# Altium PCB SSRoof.PcbDoc
Units mm, origin at the board's own origin, x right, y up, seen from the top; angles counter-clockwise.
Board outline 40.02 x 40.01 mm, 2 copper layers (Top Layer, Bottom Layer); 45 components, 37 nets, 202 pads, 29 vias.
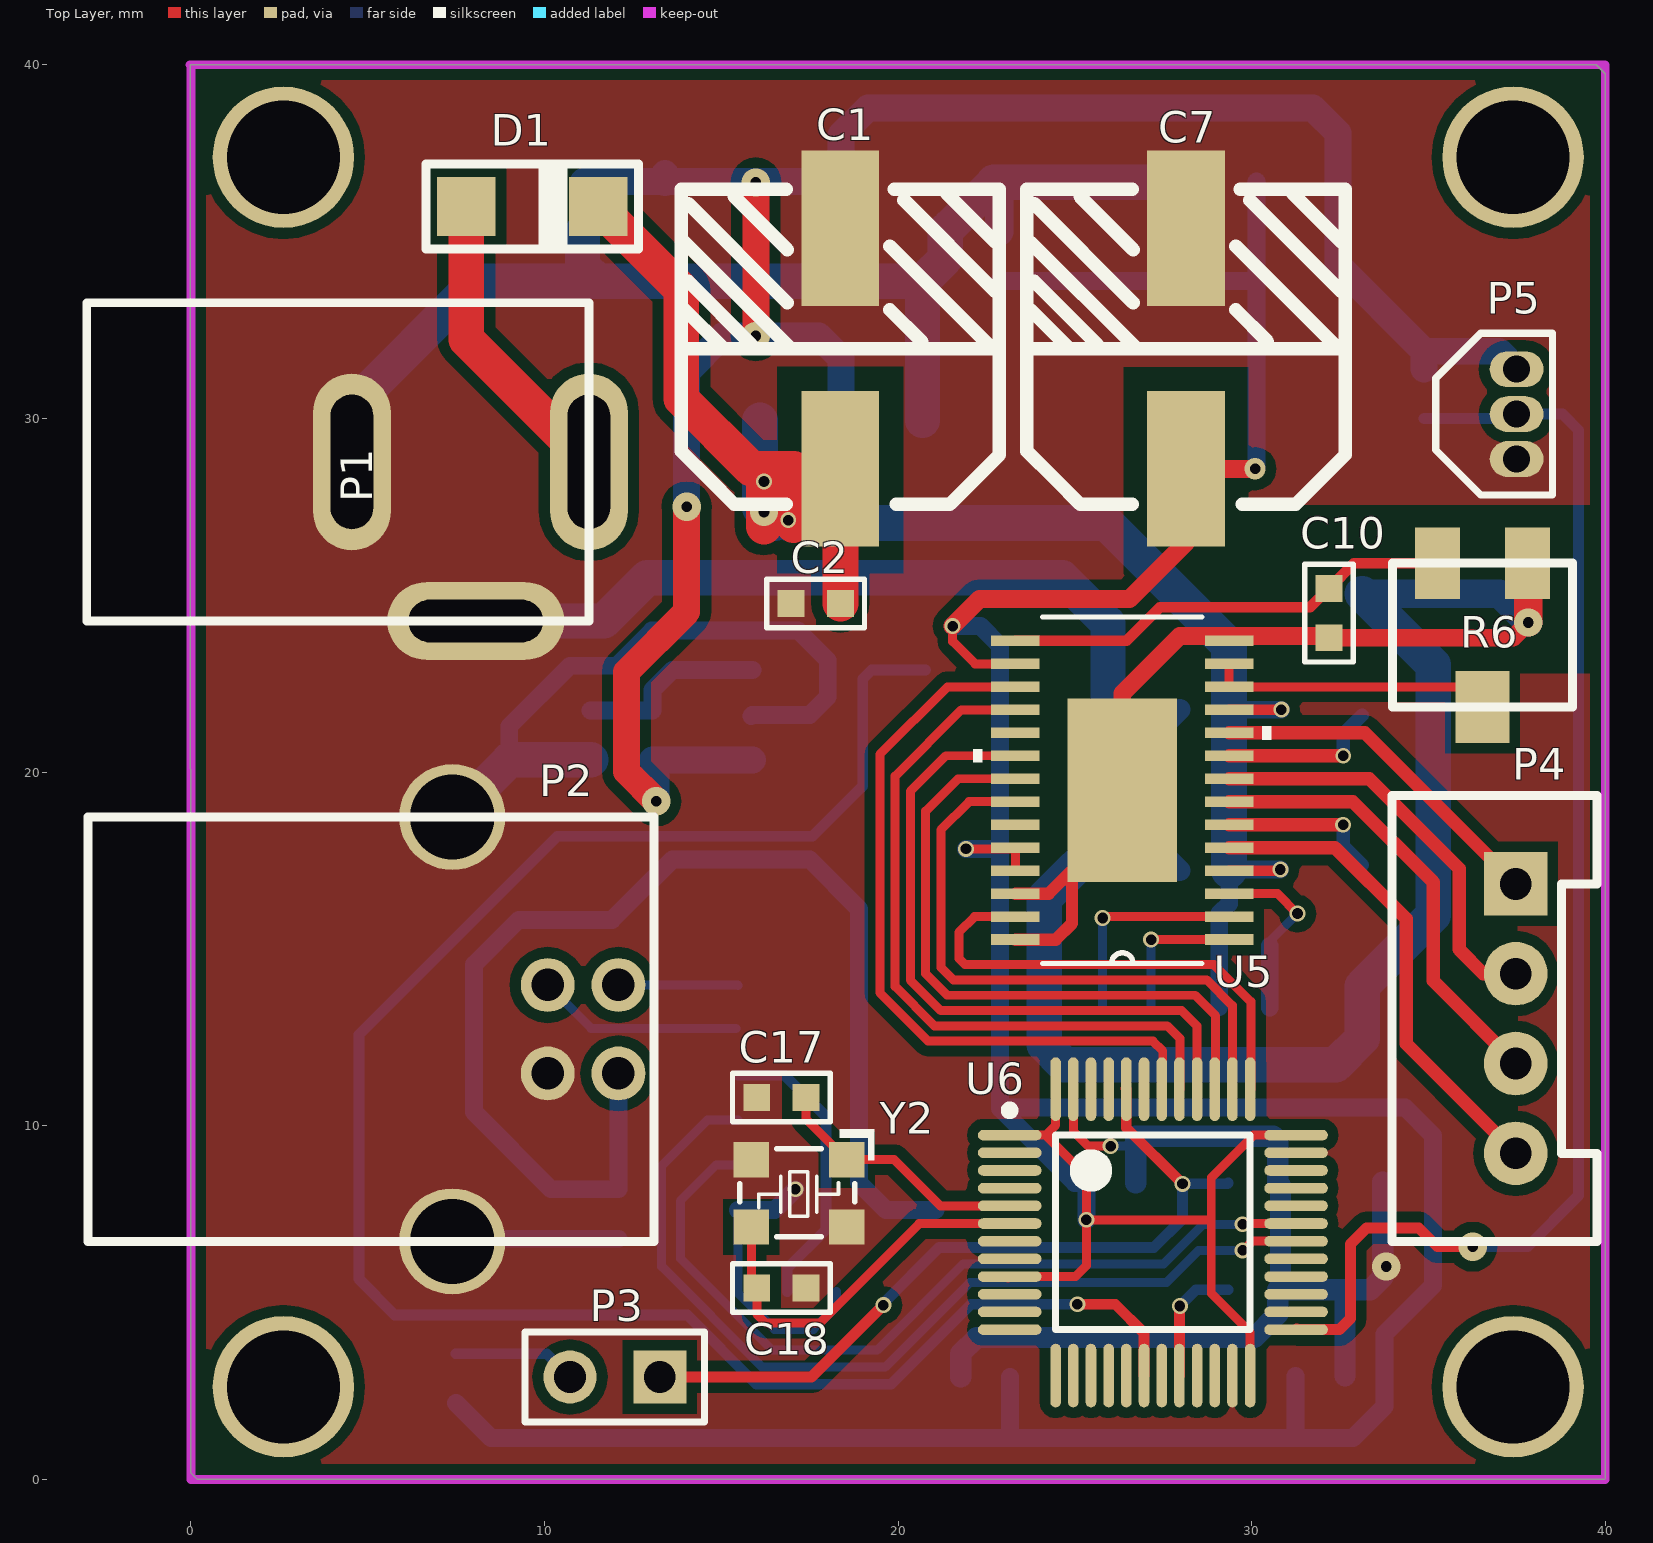
[diagram p0: Top Layer view]
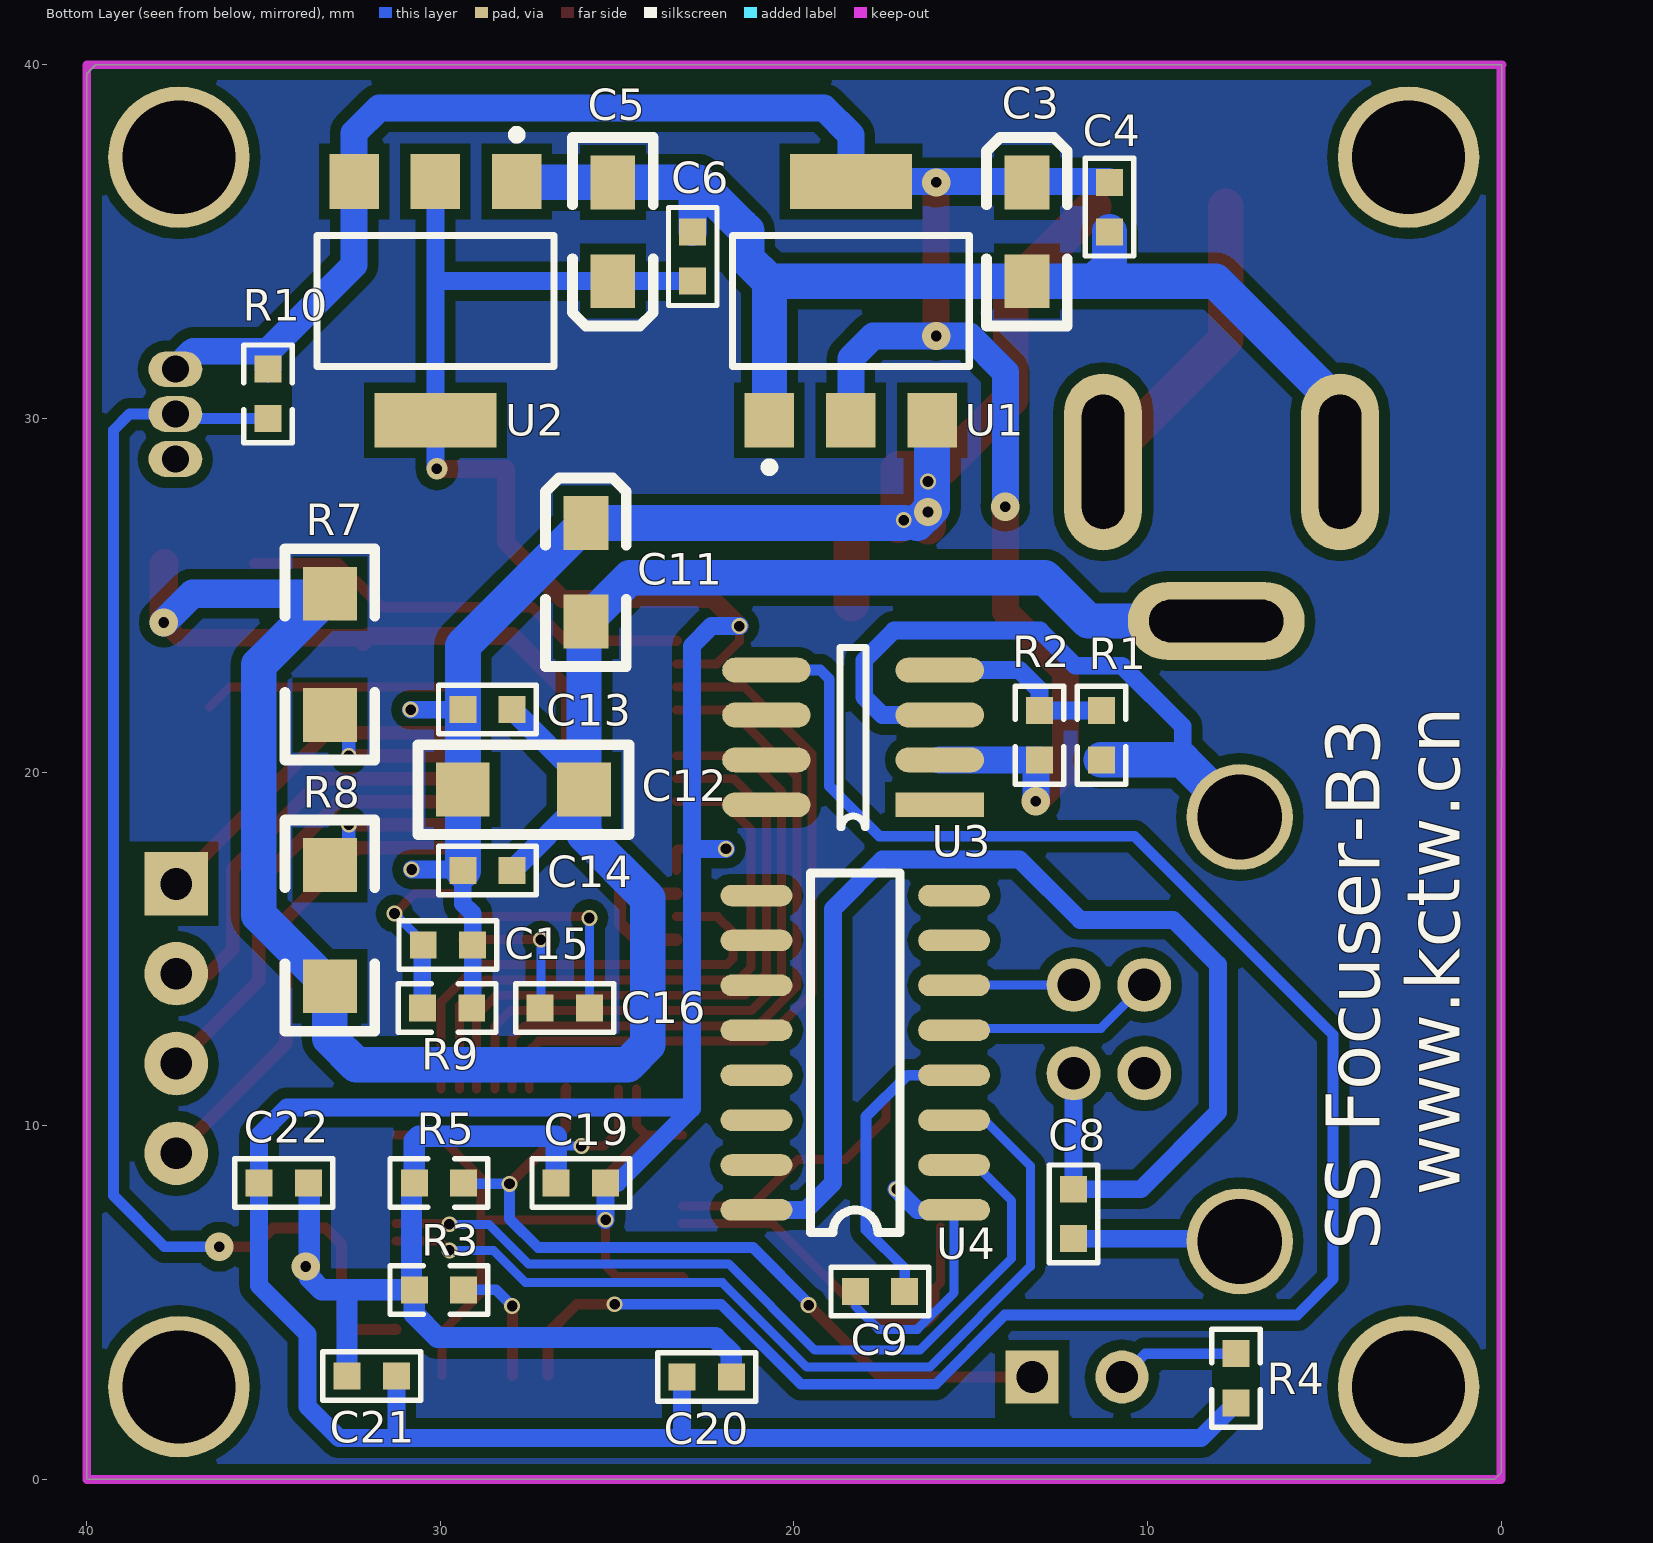
[diagram p1: Bottom Layer view, seen from below]

## Layer stack, top to bottom
Top Solder: solder mask 0.0102, Solder Resist, Dk 3.5
Top Layer: signal copper 0.0356
Dielectric1: dielectric 0.32, FR-4, Dk 4.8
Bottom Layer: signal copper 0.0356
Bottom Solder: solder mask 0.0102, Solder Resist, Dk 3.5

## Board outline
0,0.178 0.178,0 39.997,0 39.997,39.749 39.741,40.005 -0.02,40.005

## Design rules (kind name [scope] priority, off if disabled: settings)
Clearance Clearance_pyog [InPolygon] p1: gap=0.305
Clearance Clearance_mcu [InComponentClass('U7')] p2: gap=0.178
Clearance [All] p3: gap=0.178
HoleSize [All] p1: absolutevalues=TRUE maxlimit=25.4 minlimit=0.025 maxpercent=80.000 minpercent=20.000
MinimumSolderMaskSliver [All] p1: minsoldermaskwidth=0
PolygonConnect GNDVIA [IsVia] p1: connectstyle=Direct reliefconductorwidth=0.254 reliefentries=4 polygonreliefangle="90 Angle" airgapwidth=0.254
PolygonConnect [All] p2: connectstyle=Direct reliefconductorwidth=0.254 reliefentries=4 polygonreliefangle="90 Angle" airgapwidth=0.254
RoutingVias [All] p1: holewidth=0.711 width=1.27 viastyle="Through Hole" minholewidth=0.3 minwidth=0.45 maxholewidth=0.711 maxwidth=1.27
SilkToSilkClearance [All] p1: silktosilkclearance=0
SilkToSolderMaskClearance [IsPad] p1: minsilkscreentomaskgap=0 clearancetoexposedcopper=TRUE
SolderMaskExpansion [All] p1: expansion=0.102
Width [All] p1: maxlimit=1.27 minlimit=0.254 preferedwidth=0.254
25 further rules are at their usual default settings.

## Components (designator, comment, footprint, x,y, rotation, side; value= is the part's Value field where it differs from the comment)
C1 "470uF" 16V/470U(CD10X10D5) 18.364,31.979 r90 top
C2 "100nF" 0603C 16.967,24.765 r0 top
C3 "10uF" 3216 13.411,36.678 r90 bottom
C4 "100nF" 0603C 11.074,35.281 r90 bottom
C5 "10uF" 3216 25.121,33.884 r270 bottom
C6 "100nF" 0603C 22.86,35.281 r270 bottom
C7 "1000uF" 16V/470U(CD10X10D5) 28.143,31.979 r90 top
C8 "100nF" 0603C 12.09,6.807 r90 bottom
C9 "100nF" 0603C 18.263,5.309 r180 bottom
C10 "0.47uF" 0603C 32.182,23.8 r90 top
C11 "10uF" 3216 25.883,27.051 r90 bottom
C12 "4.7uF" 1206C 29.362,19.507 r180 bottom
C13 "100nF" 0603C 27.965,21.768 r0 bottom
C14 "100nF" 0603C 27.965,17.221 r0 bottom
C15 "100nF" 0603C 29.083,15.113 r0 bottom
C16 "10nF" 0603C 25.781,13.335 r0 bottom
C17 "20pF" 0603C 17.399,10.795 r180 top
C18 "20pF" 0603C 16.002,5.41 r0 top
C19 "100nF" 0603C 26.721,8.382 r180 bottom
C20 "100nF" 0603C 21.768,2.896 r0 bottom
C21 "100nF" 0603C 32.639,2.921 r180 bottom
C22 "100nF" 0603C 33.731,8.382 r0 bottom
D1 "M7" DO-214AC 9.652,35.992 r0 top
P1 "SOURCE" DC_5.5MM -2.946,33.274 r0 top locked
P2 "USB-B" USB-B 12.09,11.481 r0 top locked
P3 "BOOT0" HDR1X2 13.259,2.896 r180 top
P4 "Header 4" XH_4_V 37.465,16.84 r270 top
P5 "DS18B20" TO-92B 37.49,31.394 r270 top
R1 "2K" 0603R 11.303,21.742 r270 bottom
R2 "4.7K" 0603R 13.056,21.742 r270 bottom
R3 "10K" 0603R 30.734,5.359 r180 bottom
R4 "4.7K" 0603R 7.493,3.556 r270 bottom
R5 "10K" 0603R 29.337,8.382 r0 bottom
R6 "RPot" VR_SMD 36.525,23.876 r180 top
R7 "0.1Ω" 1206R 33.122,25.044 r270 bottom
R8 "0.1Ω" 1206R 33.122,13.945 r90 bottom
R9 "1M" 0603R 30.505,13.335 r180 bottom
R10 "4.7K" 0603R 34.874,29.997 r90 bottom
U1 "AMS1117-5.0" SOT223 18.39,33.325 r180 bottom
U2 "AMS1117-3.3" SOT223 30.136,33.325 r0 bottom
U3 "MAX813LCSA" SOP-8 15.875,19.075 r0 bottom
U4 "CH340C" SO-16 15.469,7.62 r0 bottom
U5 "DRV8825" HTSSOP 26.34,19.488 r180 top
U6 "STM32F103C8T6" LQFP48_N 27.203,6.985 r270 top
Y2 "8MHz  无源" X3225 18.517,9.068 r180 top

## Footprints (in the part's own frame and the unit in brackets; to place one, negate y for a bottom-side part, rotate by r counter-clockwise, add the part's x,y. Pads: shape width x height; smd on the part's side, far side on the other; paste and mask are expansions set on the pad)
16V/470U(CD10X10D5) [mm] "取自《FE-3AD》"
  rect 4.4x2.2 smd: 1(-3.4,0) 2(3.4,0)
  Top Layer pour cut-out: -6.35,1.778 -0.508,1.778 -0.508,-1.778 -6.35,-1.778
  silkscreen extent -4.4,-4.5 4.5,4.5
0603C [mil]
  rect 30x30 smd: 1(0,0) 2(55,0)
  silkscreen extent -27,-27 82,27, body extent -4,-16 58,16, height 12
0603R [mil]
  rect 30x30 smd: 1(0,0) 2(55,0)
  silkscreen extent -27,-27 82,27, body extent -4,-18 58,16, height 18
1206C [mil]
  rect 60x60 smd: 1(0,0) 2(135,0)
  silkscreen extent -50,-50 185,50, body extent 6,-33 132,29, height 40
1206R [mil]
  rect 60x60 smd: 1(0,0) 2(135,0)
  silkscreen extent -50,-50 185,50, body extent 5,-32 131,30, height 22
3216 [mil]
  rect 60x50 smd: 1(0,0) 2(-110,0)
  silkscreen extent -160,-45 50,45, body extent -151,-35 38,36, height 73
DC_5.5MM [mm]
  oval 2.2x5 hole 1.2 slot 3.8 at 90 deg: 1(14.2,-4.5) 2(7.5,-4.5)
  oval 5x2.2 hole 1.2 slot 3.8 at 0 deg: 3(11,-9)
  silkscreen extent 0,-9 14.2,0, body extent -0.1,-8.88 14.1,-0.12, height 10.82
DO-214AC [mm]
  rect 1.655x1.67 smd: 1(1.865,0) 2(-1.865,0)
  silkscreen extent -3,-1.2 3,1.2, body extent -2.74,-1.4 2.74,1.4, height 2.3
HDR1X2 [mm] "Connector; Header; 2 Position"
  rect 1.5x1.5 hole 0.9: 1(0,0)
  round 1.5 hole 0.9: 2(2.54,0)
  silkscreen extent -1.27,-1.27 3.81,1.27, body extent -1.27,-1.27 3.81,1.27, height 7.58
HTSSOP [mil]
  rect 54x12 smd: 1(-119,166.34) 2(-119,140.75) 3(-119,115.16) 4(-119,89.57) 5(-119,63.98) 6(-119,38.39) 7(-119,12.8) 8(-119,-12.8) 9(-119,-38.39) 10(-119,-63.98) 11(-119,-89.57) 12(-119,-115.16) 13(-119,-140.75) 14(-119,-166.34) 15(119,-166.34) 16(119,-140.75) 17(119,-115.16) 18(119,-89.57) 19(119,-63.98) 20(119,-38.39) 21(119,-12.8) 22(119,12.8) 23(119,38.39) 24(119,63.98) 25(119,89.57) 26(119,115.16) 27(119,140.75) 28(119,166.34)
  rect 122.05x203.94 smd: 29(0,0)
  silkscreen extent -166,-193 166,193, body extent -133,-191 120,191, height 40
LQFP48_N [mm]
  oval 0.3x1.8 smd: 1(-2.75,-4.05) 2(-2.25,-4.05) 3(-1.75,-4.05) 4(-1.25,-4.05) 5(-0.75,-4.05) 6(-0.25,-4.05) 7(0.25,-4.05) 8(0.75,-4.05) 9(1.25,-4.05) 10(1.75,-4.05) 11(2.25,-4.05) 12(2.75,-4.05) 25(2.75,4.05) 26(2.25,4.05) 27(1.75,4.05) 28(1.25,4.05) 29(0.75,4.05) 30(0.25,4.05) 31(-0.25,4.05) 32(-0.75,4.05) 33(-1.25,4.05) 34(-1.75,4.05) 35(-2.25,4.05) 36(-2.75,4.05)
  oval 1.8x0.3 smd: 13(4.05,-2.75) 14(4.05,-2.25) 15(4.05,-1.75) 16(4.05,-1.25) 17(4.05,-0.75) 18(4.05,-0.25) 19(4.05,0.25) 20(4.05,0.75) 21(4.05,1.25) 22(4.05,1.75) 23(4.05,2.25) 24(4.05,2.75) 37(-4.05,2.75) 38(-4.05,2.25) 39(-4.05,1.75) 40(-4.05,1.25) 41(-4.05,0.75) 42(-4.05,0.25) 43(-4.05,-0.25) 44(-4.05,-0.75) 45(-4.05,-1.25) 46(-4.05,-1.75) 47(-4.05,-2.25) 48(-4.05,-2.75)
  silkscreen extent -3.57,-4.17 2.75,2.75, body extent -4.5,-4.5 4.5,4.5, height 1.5
SO-16 [mil]
  oval 80x24 smd: 1(0,0) 2(0,-50) 3(0,-100) 4(0,-150) 5(0,-200) 6(0,-250) 7(0,-300) 8(0,-350) 9(220,-350) 10(220,-300) 11(220,-250) 12(220,-200) 13(220,-150) 14(220,-100) 15(220,-50) 16(220,0)
  silkscreen extent 60,-375 160,25, body extent -12,-377 226,29, height 77
SOP-8 [mm]
  rect 2.5x0.7 smd: 1(0,0)
  oval 2.5x0.7 smd: 2(0,-1.27) 3(0,-2.54) 4(0,-3.81) 5(4.9,-3.81) 6(4.9,-2.54) 7(4.9,-1.27) 8(4.9,0)
  silkscreen extent 2.08,-4.44 2.82,0.64, body extent -0.56,-4.44 5.48,0.58, height 1.6
SOT223 [mm] "SOT-223/SC-73; 4 Leads; Body 6.7 x 7.3 mm, inc. leads (LxW max)"
  rect 1.4x1.55 smd: 1(-2.3,-3.375) 2(0,-3.375) 3(2.3,-3.375)
  rect 3.45x1.55 smd: 4(0,3.375)
  silkscreen extent -3.35,-4.82 3.35,1.85, body extent -3.25,-3.53 3.25,3.43, height 1.7
TO-92B [mil]
  oval 40x60 hole 30: 1(0,0) 2(50,0) 3(100,0)
  silkscreen extent -40,-90 140,40
USB-B [mm]
  round 1.524 hole 0.92: 1(0,0) 2(0,2.5) 3(-2,2.5) 4(-2,0)
  round 3 hole 2.4: 5(-4.7,7.25) 6(-4.7,-4.75)
  silkscreen extent -15,-4.75 1,7.25
VR_SMD [mil]
  rect 50x80 smd: 1(-50,-80) 2(50,-80)
  rect 60x80 smd: 3(0,80)
  silkscreen extent -100,-80 100,80
X3225 [mm]
  rect 1x1 smd: 1(-0.025,0.025) 2(2.667,0.025) 3(2.667,1.93) 4(-0.025,1.93)
  silkscreen extent -0.81,-0.84 3,2.21, body extent -0.23,-0.29 2.97,2.21, height 0.72
XH_4_V [mm]
  rect 1.8x1.8 hole 0.9: 1(0,0)
  round 1.8 hole 0.9: 2(2.54,0) 3(5.08,0) 4(7.62,0)
  silkscreen extent -2.5,-3.5 10.12,2.3, body extent -2.39,-3.35 10.01,2.75, height 7

## Part data
C1: library part C470UF016S, "470UF      16V      CD10X10D5"
C2 C4 C6 C8 C10 C12 C13 C14 C15 C16 C17 C18 C19 C20 C21 C22: library part Cap, "Capacitor"
C3 C5 C7 C11: library part CAP2
C9: library part C
D1: library part Diode, "High Conductance Fast Diode"
P3: library part MHDR1X2, "Header, 2-Pin"
P4: "Header, 4-Pin"
P5: library part "Header 3", "Header, 3-Pin"
R1 R2 R5 R7 R8 R10: library part RES, "Resistor"
R3 R4 R9: library part R
R6: "Potentiometer"
U1 U2: library part AMS1117
U3: library part MAX813L
U4: library part CH340G, "USB2UART"
U6: "STM32 ARM-based 32-bit MCU Performance Line with 64 kB Flash, 20 kB Internal RAM, -40 to +85癈 Temperature, 48-Pin LQFP, Tray"
Y2: library part XTAL_1, "Crystal Oscillator"

## Free pads (board coordinates)
  round 4 hole 3.2: 0(2.616,2.616) 1(37.389,2.616) 2(37.389,37.389) 3(2.616,37.389)

## Via types
v1: diameter 0.45, hole 0.3, Top Layer to Bottom Layer, 20 vias
v2: diameter 0.8, hole 0.3, Top Layer to Bottom Layer, 8 vias
v3: diameter 0.6, hole 0.3, Top Layer to Bottom Layer, 1 vias

## Nets (pads, with @x,y where several pads share a name; then routed paths per layer and width w, separated by ;. In a path a pad name is that pad's centre, name@x,y a point inside that pad or via, vN(x,y) a via of type N, cw(c..) or ccw(c..) an arc to the next point about the centre after c; other vN are vias at no path point)
A1: P4.4 U5.5 | length 13.8
  Top Layer w0.381: U5.5 32.353,17.863 34.366,15.85 34.366,12.319 P4.4
A2: P4.3 U5.7 | length 12.8
  Top Layer w0.381: U5.7 32.856,19.163 35.128,16.891 35.128,14.097 P4.3
B1: P4.1 U5.10 | length 9.9
  Top Layer w0.381: U5.10 33.192,21.113 P4.1
B2: P4.2 U5.8 | length 11.7
  Top Layer w0.381: U5.8 33.324,19.813 35.865,17.272 35.865,14.986 36.551,14.3 P4.2
BOOT0: P3.1 R5.1 U6.44 | length 22.3
  Top Layer w0.305: P3.1 17.551,2.896 v1(19.583,4.928) ; U6.44@26.434,11.055 U6.44 26.453,9.945 v1(28.042,8.357)
  Bottom Layer w0.305: v1@19.558,4.953 21.158,6.553 27.229,6.553 28.042,7.366 v1(28.042,8.357) 29.312,8.357 R5.1
BOOT1: R3.2 U6.20 | length 3.5
  Top Layer w0.305: U6.20 v1@27.953,4.89
  Bottom Layer w0.305: v1(27.965,4.902) 28.423,5.359 R3.2
D3V3: C5.1 C6.2 C7.1 C19.2 C20.2 C21.2 C22.2 R4.2 U2.2 U2.4 U5.16 U5.24 U5.25 U6.1 U6.9 U6.24 U6.36 U6.48 | length 124.1
  Top Layer w0.254: v1(21.539,24.13) 21.539,23.698 22.174,23.063 U5.16 ; v1(21.92,17.831) 23.285,17.831 23.317,17.798 U5.25 ; U6.9@23.108,5.69 U6.9 25.014,5.735 25.324,6.045 v1(25.324,7.341) ; U6.1 24.174,9.735 ; U6.48 24.453,10.014 24.174,9.735 ; 28.854,7.341 v1(25.324,7.341) ; U6.24 29.953,4.159 28.854,5.258 28.854,8.534 30.055,9.735 U6.36 ; 24.174,9.735 25.324,8.585 v1(25.324,7.341)
  Top Layer w0.508: v1(21.539,24.13) 22.301,24.892 26.543,24.892 28.143,26.492 C7.1 v3(30.095,28.579)
  Bottom Layer w0.508: R4.2 8.484,1.168 23.165,1.168 ; v1(21.539,24.13) 22.327,24.13 22.885,23.571 22.885,17.831 ; v1(21.92,17.831) 22.885,17.831 ; C6.2 C5.1 30.11,33.884 30.136,33.909 ; C20.2 23.165,1.168 ; v1(25.324,7.341) C19.2 24.994,8.382 22.885,10.49 22.885,10.516 ; v3@30.124,28.575 30.136,28.586 U2.4 30.136,33.909 ; U2.2 30.136,33.909 ; 31.242,1.245 C21.2 ; 35.128,7.163 35.128,5.486 33.757,4.115 33.757,2.057 32.868,1.168 23.165,1.168 ; 35.128,7.214 C22.2 35.128,9.728 34.341,10.516 22.885,10.516 ; 22.885,10.516 22.885,17.831
D5V0: C3.1 C4.2 P5.1 R2.2 R10.2 U1.2 U1.4 U2.3 U3.2 | length 62.4
  Top Layer w0.762: v2(13.157,19.177) 12.319,20.015 12.319,22.835 14.021,24.536 v2(14.021,27.508) ; v2(15.977,32.334) v2(15.977,36.678)
  Bottom Layer w0.762: C4.2@11.097,36.7 C3.1@13.411,36.7 ; v2(13.157,19.177) 13.157,20.244 R2.2 U3.2 ; C3.1 C3.1@13.411,36.7 ; C3.1@13.411,36.932 C3.1@13.411,36.7 ; v2(14.021,27.508) 14.021,31.318 15.037,32.334 v2(15.977,32.334) 17.755,32.334 18.39,31.699 U1.2 ; R10.2 34.874,31.902 ; P5.1 36.982,31.902 34.874,31.902 ; C3.1@13.411,36.7 U1.4 18.39,38.024 19.152,38.786 31.725,38.786 32.436,38.075 U2.3 32.436,34.341 34.874,31.902
D12V0: C1.1 C2.2 C11.1 C12.1 C13.2 C14.2 C15.1 D1.1 R9.2 U1.3 U5.4 U5.11 | length 48.7
  Top Layer w0.3: U5.4 v1@30.81,17.213 ; U5.11 v1@30.836,21.763
  Top Layer w1: D1.1 13.868,33.64 13.868,30.556 15.846,28.579 17.043,28.579 v1@17.043,26.975
  Top Layer w1.016: 16.205,26.949 v1(16.205,28.219) ; C2.2 C1.1@18.364,27.026
  Bottom Layer w0.5: R9.2@29.083,13.36 C15.1 29.083,16.002 29.362,16.281 C14.2 ; C13.2 v1(30.836,21.768) ; C14.2@29.388,17.247 v1(30.81,17.247)
  Bottom Layer w1.016: U1.3 16.09,27.471 v2(16.205,27.356) 16.51,27.051 ; v1@16.891,27.051 C11.1 29.362,23.571 C13.2 C12.1 C14.2
  other v1: 16.891,27.127
DIR: U5.20 U6.40 | length 19.2
  Top Layer w0.254: U5.20 21.352,20.463 20.345,19.456 20.345,14.12 21.207,13.259 28.016,13.259 28.448,12.827 U6.40@28.448,11.035
EN: U5.21 U6.39 | length 18.3
  Top Layer w0.254: U5.21 21.693,19.813 20.777,18.898 20.777,14.299 21.386,13.691 28.397,13.691 28.981,13.106 U6.39@28.981,11.035
FLT: U5.18 U6.41 | length 20.2
  Top Layer w0.254: U5.18 21.789,21.763 19.914,19.888 19.914,13.941 21.028,12.827 27.61,12.827 27.965,12.471 U6.41@27.965,11.035
GND: C1.2 C2.1 C3.2 C4.1 C5.2 C6.1 C7.2 C8.1 C9.1 C10.1 C11.2 C12.2 C13.1 C14.1 C17.2 C18.2 C19.1 C20.1 C21.1 C22.1 P1.2 P1.3 P2.4 P2.5 P2.6 P5.3 R1.2 R3.1 R5.2 R6.1 R7.1 R8.1 U1.1 U2.1 U3.3 U4.1 U5.14 U5.26 U5.28 U5.29 U6.8 U6.23 U6.35 U6.47 Y2.2 Y2.4 | length 189.8
  Top Layer w0.254: U6.47 24.953,9.845 25.375,9.423 v1(26.01,9.423)
  Top Layer w0.35: U5.28 24.458,15.263 24.917,15.723 U5.29@24.917,17.221 ; U5.26 24.259,16.563 U5.29@24.917,17.221 ; U5.29 26.34,18.644 U5.29@24.917,17.221
  Top Layer w0.5: U5.29 26.34,22.225 27.965,23.851 32.004,23.851 C10.1@32.182,23.673 ; C10.1 37.389,23.8 v2(37.821,24.232)
  Top Layer w0.8: R6.1 37.821,25.883 v2(37.821,24.232)
  Top Layer w1: P1.2@4.554,27.774 P1.2 ; P2.5@6.745,18.731 P2.5
  Bottom Layer w0.254: U4.1@15.469,7.442 15.469,5.283 16.51,4.242 17.602,4.242 18.263,4.902 C9.1 ; v1(26.01,9.423) 26.441,9.423 26.721,9.703 ; C22.1@33.63,8.484 C22.1
  Bottom Layer w0.5: P2.6 7.467,6.807 C8.1 ; 9.005,20.345 9.005,21.299 10.719,23.012 12.04,23.012 13.03,24.003 17.17,24.003 18.009,23.165 18.009,22.123 17.501,21.615 U3.3 U3.3@15.85,21.59
  Bottom Layer w0.508: U4.1 16.51,7.62 v1(17.094,8.204)
  Bottom Layer w0.6: C20.1 21.768,3.556 22.225,4.013 30.074,4.013 30.734,4.674 R3.1 32.639,5.359 ; C12.2@25.933,19.253 C14.1 ; C12.2@25.933,19.736 C13.1 ; C19.1 26.721,9.703 30.607,9.703 30.734,9.576 R5.2 ; R3.1@30.81,5.436 R5.2@30.81,8.306 ; C21.1 32.639,5.359 ; C22.1@33.706,8.407 33.706,5.715 33.35,5.359 32.639,5.359
  Bottom Layer w0.8: 22.708,36.678 22.86,36.525 C6.1 ; R7.1 37.008,25.044 v2(37.821,24.232)
  Bottom Layer w1: P1.2@4.496,30.302 8.077,33.884 11.506,33.884 ; P2.5 9.005,20.345 R1.2 ; P1.3 11.676,24.274 12.903,25.502 24.638,25.502 C11.2 25.933,24.206 25.933,19.736 C12.2 25.933,19.253 25.933,18.237 24.13,16.434 24.13,12.294 24.697,11.727 32.377,11.727 33.122,12.471 R8.1 35.128,15.951 35.128,23.038 R7.1 ; C4.1 11.074,34.315 11.506,33.884 ; U1.1 20.69,33.884 ; 21.336,35.306 21.336,34.53 20.69,33.884 ; 21.476,35.446 22.708,36.678 C5.2 27.813,36.678 U2.1 ; 11.506,33.884 C3.2 20.69,33.884
  other v2: 33.807,6.02
HOME: U5.27 U6.37 | length 13.8
  Top Layer w0.254: U5.27 22.161,15.913 21.717,15.469 21.717,14.732 21.895,14.554 28.931,14.554 29.972,13.513 U6.37@29.972,11.035
NetC9_2: C9.2 U4.4 | length 8.4
  Bottom Layer w0.305: U4.4 16.789,11.43 17.958,10.262 17.958,7.061 16.866,5.969 C9.2
NetC15_2: C15.2 R9.1 U5.3 | length 5.1
  Top Layer w0.254: U5.3 30.732,16.563 v1(31.293,16.002)
  Bottom Layer w0.254: C15.2 30.48,15.189 v1(31.293,16.002)
  Bottom Layer w0.5: R9.1 C15.2@30.505,15.088
NetC16_1: C16.1 U5.2 | length 6.1
  Top Layer w0.254: v1@25.781,15.913 U5.2
  Bottom Layer w0.254: C16.1 v1(25.781,15.875)
NetC16_2: C16.2 U5.1 | length 4.1
  Top Layer w0.254: v1(27.153,15.265) 27.155,15.263 U5.1
  Bottom Layer w0.254: C16.2@27.153,13.36 v1(27.153,15.265)
NetD1_1: D1.2 P1.1 | length 8.7
  Top Layer w1.016: D1.2 7.787,32.241 P1.1
NetP2_2: P2.2 U4.6 | length 3.4
  Bottom Layer w0.254: P2.2 15.458,13.981 U4.6
NetP2_3: P2.3 U4.5 | length 5.8
  Bottom Layer w0.254: P2.3 11.32,12.751 U4.5@15.418,12.751
NetP3_2: P3.2 R4.1 | length 3.5
  Bottom Layer w0.3: R4.1 10.058,3.556 P3.2
NetR1_1: R1.1 R2.1 U3.4 | length 5.4
  Bottom Layer w0.508: R1.1 R2.1 13.056,22.327 13.614,22.885 U3.4
NetR6_3: R6.3 U5.12 U5.13 | length 8
  Top Layer w0.254: U5.13 U5.12 35.956,22.413 R6.3
NetR7_2: R7.2 U5.9 | length 4.6
  Top Layer w0.381: U5.9 v1(32.588,20.463)
  Bottom Layer w0.381: v1(32.588,20.463) 32.588,21.082 R7.2
NetR8_2: R8.2 U5.6 | length 4.6
  Top Layer w0.381: U5.6 v1(32.585,18.513)
  Bottom Layer w0.381: v1(32.585,18.513) 32.585,17.91 R8.2
OSC_IN: C17.1 U6.5 Y2.1 | length 7.4
  Top Layer w0.254: C17.1 17.399,10.185 Y2.1 19.888,9.042 21.196,7.735 U6.5
OSC_OUT: C18.1 U6.6 Y2.3 | length 10.9
  Top Layer w0.254: Y2.3 15.85,5.563 C18.1 16.002,4.674 16.256,4.42 17.78,4.42 20.595,7.235 U6.6
PFO: U3.5 U6.18 | length 54.9
  Top Layer w0.305: v1(25.07,4.953) 26.137,4.953 26.953,4.136 U6.18
  Bottom Layer w0.305: U3.5 19.253,22.885 18.999,22.631 18.999,19.609 17.577,18.186 10.363,18.186 4.75,12.573 4.75,5.664 5.766,4.648 14.035,4.648 15.99,2.692 19.798,2.692 22.059,4.953 v1(25.07,4.953)
RESET: U6.7
RXD: U4.3 U6.30 | length 26.1
  Top Layer w0.254: v1(29.743,6.477) 29.756,6.477 30.014,6.735 U6.30
  Bottom Layer w0.254: U4.3 14.605,10.16 13.31,8.865 13.31,6.02 16.154,3.175 19.634,3.175 22.022,5.563 27.584,5.563 28.499,6.477 v1(29.743,6.477)
SLP: U5.17 U6.42 | length 21.1
  Top Layer w0.254: U5.17 21.396,22.413 19.482,20.499 19.482,13.763 20.849,12.395 27.203,12.395 27.483,12.116 U6.42@27.483,11.035
STEP: U5.22 U6.38 | length 17.4
  Top Layer w0.254: U5.22 22.008,19.163 21.209,18.364 21.209,14.478 21.565,14.122 28.727,14.122 29.453,13.396 U6.38
TEMP: P5.2 R10.1 U6.25 | length 37.5
  Top Layer w0.305: U6.25@31.273,4.255 U6.25 32.48,4.235 32.791,4.547 32.791,6.655 33.249,7.112 34.722,7.112 35.255,6.579 v2(36.246,6.579)
  Bottom Layer w0.305: R10.1 37.363,29.997 P5.2 38.786,30.124 39.243,29.667 39.243,8.026 37.795,6.579 v2(36.246,6.579)
TXD: U4.2 U6.31 | length 23.6
  Top Layer w0.254: v1(29.743,7.214) 29.765,7.235 U6.31
  Bottom Layer w0.254: U4.2 14.859,8.89 13.843,7.874 13.843,6.248 16.434,3.658 19.406,3.658 21.844,6.096 27.507,6.096 28.625,7.214 v1(29.743,7.214)
V3.3: C10.2 R6.2 U5.15 | length 12.8
  Top Layer w0.305: U5.15 26.456,23.713 27.407,24.663 31.648,24.663 C10.2 32.893,25.908 R6.2
VBUS: C8.2 P2.1 U4.16 | length 34.9
  Bottom Layer w0.508: P2.1@12.09,11.049 C8.2 10.185,8.204 8.001,10.389 8.001,14.554 9.271,15.824 11.913,15.824 13.614,17.526 17.501,17.526 18.898,16.129 18.898,8.382 19.66,7.62 U4.16
pads on no net: U3.1 U3.6 U3.7 U3.8 U4.7 U4.8 U4.9 U4.10 U4.11 U4.12 U4.13 U4.14 U4.15 U5.19 U5.23 U6.2 U6.3 U6.4 U6.10 U6.11 U6.12 U6.13 U6.14 U6.15 U6.16 U6.17 U6.19 U6.21 U6.22 U6.26 U6.27 U6.28 U6.29 U6.32 U6.33 U6.34 U6.43 U6.45 U6.46

## Polygon pours and split planes (outlines as drawn)
no net on Bottom Layer "Bottom Layer-No Net" (solid, pour order 21): 0,0 39.997,0 39.997,39.749 39.741,40.005 0,40.005
GND on Top Layer "Bottom Layer-No Net" (solid, remove dead copper, pour order 4): 0,0 39.997,0 39.997,22.801 40.005,22.809 39.98,22.784 29.362,22.784 29.362,15.263 28.755,14.656 24.079,14.656 23.924,14.656 23.317,15.263 23.317,23.713 29.225,23.713 29.362,23.851 29.362,26.416 29.362,27.559 39.997,27.559 39.997,40.005 0,40.005

## Keep-outs
Keep-Out Layer:
  lines w0.254: -0.02,40.005 39.997,40.005 39.997,0 0,0 0,40.005

## Silkscreen, mask and mechanical layers (free items; w line width, h text height)
Bottom Overlay:
  text "www.kctw.cn" at 1.168,8.026 h1.52 r270
  text "SS Focuser-B3" at 3.429,6.477 h1.52 r270

## Dimensions
39.997,40.005 to 39.997,0 on Top Overlay
0,0 to 39.997,0 on Top Overlay